# EAGLE board board (EAGLE 7.7.0)
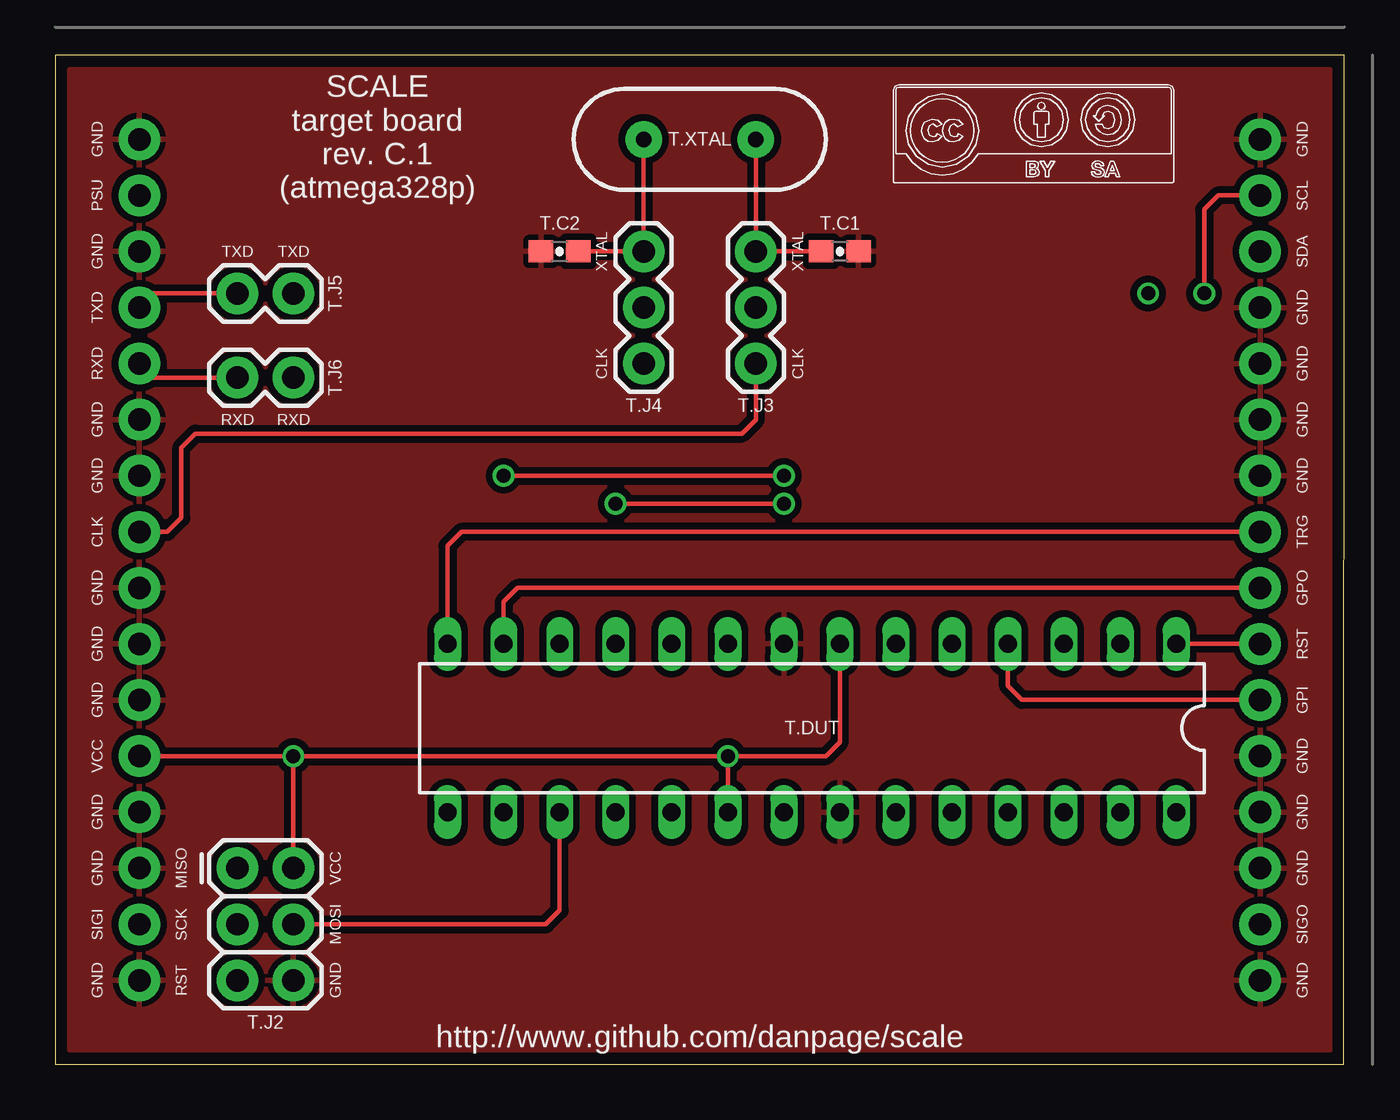
[diagram p0: board, top side]
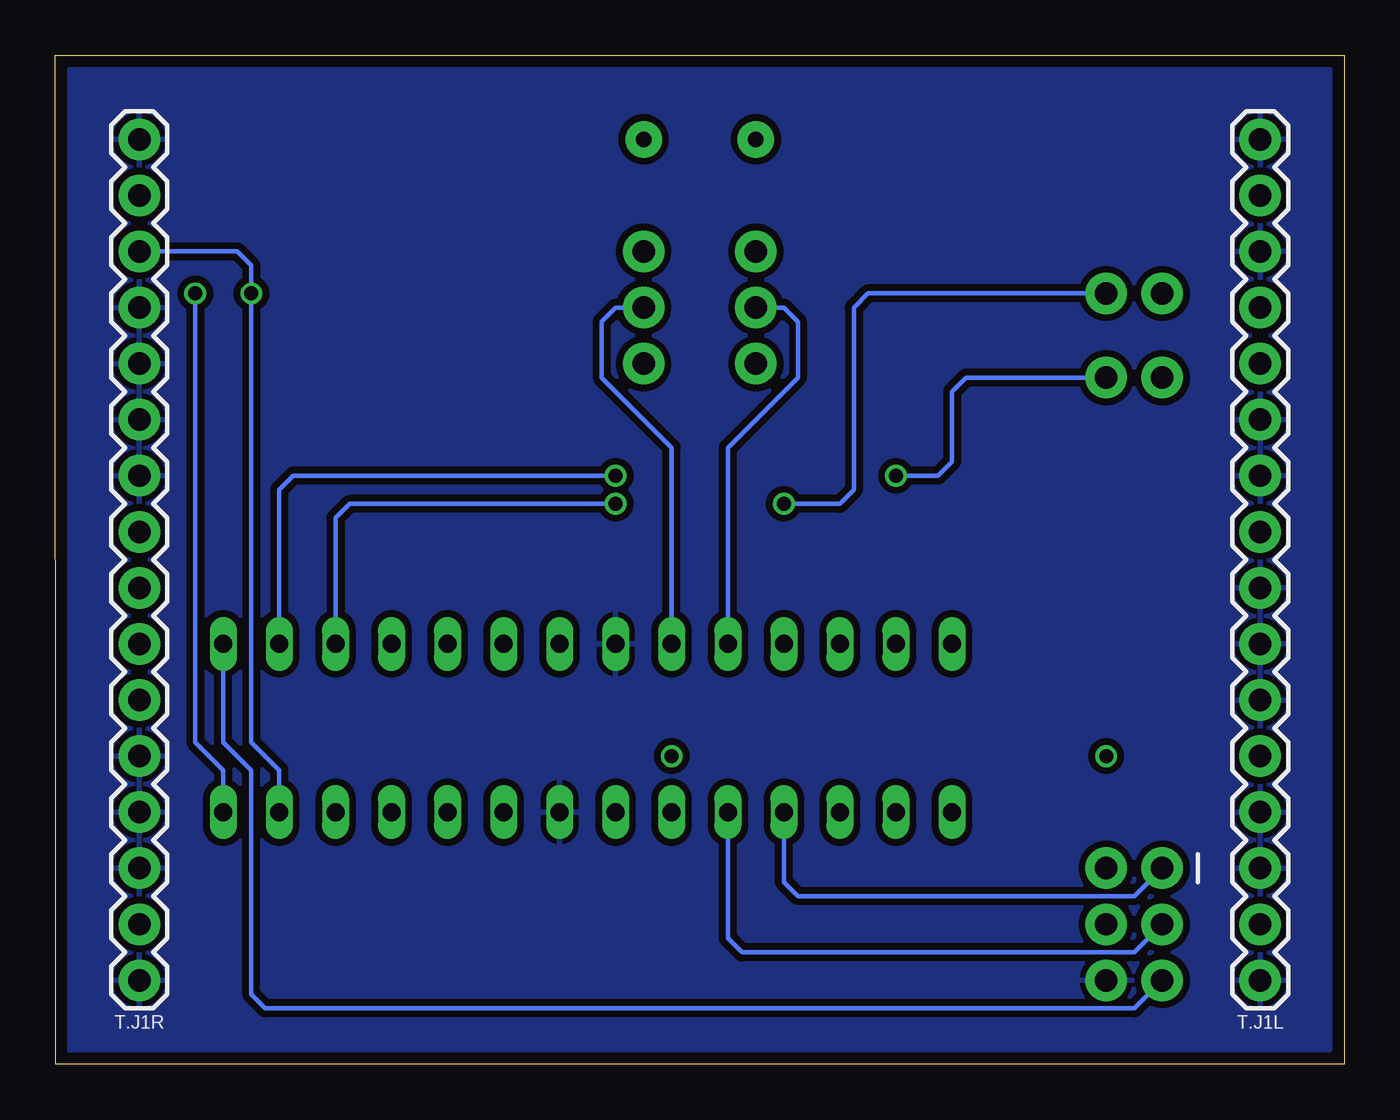
[diagram p1: board, bottom side, seen from below]

Size 58.42 x 45.72 mm. Coordinates in mm from the lower left corner, seen from the top.
Outline: 0,0 58.4,0 58.42,45.72 0,45.72 0,0
Copper layers (1*16): Top 0.0356mm / dielectric 1.5011mm / Bottom 0.0356mm
Design rules "oshpark-2layer": minimum track width 6mil, minimum drill 13mil, track to track 6mil, track to pad 6mil, pad to pad 6mil, via to via 6mil, smd to smd 6mil, copper to edge 15mil, drill to drill 6mil, minimum pad ring 7mil, minimum via ring 7mil, stop-mask expansion 2.5mil, vias tented up to drill 0mil, thermal gap 10mil

## Footprints (pad centres in the part's own frame; a part is rotated, then mirrored left to right if it is on the bottom)
0603-CAP = smd 1.1 x 1: 1 -0.85,0; 2 0.85,0
DIL28-3 = drill 0.813 long: 1 -16.51,-3.81; 2 -13.97,-3.81; 3 -11.43,-3.81; 4 -8.89,-3.81; 5 -6.35,-3.81; 6 -3.81,-3.81; 7 -1.27,-3.81; 8 1.27,-3.81; 9 3.81,-3.81; 10 6.35,-3.81; 11 8.89,-3.81; 12 11.43,-3.81; 13 13.97,-3.81; 14 16.51,-3.81; 15 16.51,3.81; 16 13.97,3.81; 17 11.43,3.81; 18 8.89,3.81; 19 6.35,3.81; 20 3.81,3.81; 21 1.27,3.81; 22 -1.27,3.81; 23 -3.81,3.81; 24 -6.35,3.81; 25 -8.89,3.81; 26 -11.43,3.81; 27 -13.97,3.81; 28 -16.51,3.81
1X16 = drill 1.016 pad 1.88: 1 0,0; 2 2.54,0; 3 5.08,0; 4 7.62,0; 5 10.16,0; 6 12.7,0; 7 15.24,0; 8 17.78,0; 9 20.32,0; 10 22.86,0; 11 25.4,0; 12 27.94,0; 13 30.48,0; 14 33.02,0; 15 35.56,0; 16 38.1,0
2X3 = drill 1.016 pad 1.88: 1 0,0; 2 0,2.54; 3 2.54,0; 4 2.54,2.54; 5 5.08,0; 6 5.08,2.54
1X03 = drill 1.016 pad 1.88: 1 0,0; 2 2.54,0; 3 5.08,0
1X02 = drill 1.016 pad 1.88: 1 0,0; 2 2.54,0
HC49US = drill 0.7 pad 1.651: 1 -2.54,0; 2 2.54,0

## Placement (x,y rotation side)
T.C1  0.022 nF = 22 pF  [0603-CAP]  35.56,36.83 180 top
T.C2  0.022 nF = 22 pF  [0603-CAP]  22.86,36.83 0 top
T.DUT  [DIL28-3]  34.29,15.24 180 top
T.J1L  [1X16]  3.81,3.81 90 bottom
T.J1R  [1X16]  54.61,3.81 90 bottom
T.J2  [2X3]  8.26,8.89 270 top
T.J3  [1X03]  31.75,36.83 270 top
T.J4  [1X03]  26.67,36.83 270 top
T.J5  [1X02]  8.26,34.92 0 top
T.J6  [1X02]  8.26,31.11 0 top
T.XTAL  16 Mhz  [HC49US]  29.21,41.91 0 top

## Library data of the parts
T.C1 T.C2 = SparkFun-Capacitors
T.DUT = ic-package
T.J1L T.J1R T.J3-T.J6 = SparkFun-Connectors
T.J2 = SparkFun-Connectors; PROD_ID: CONN-09701
T.XTAL = SparkFun-FreqCtrl

## Nets
DUT_CLK: T.J1L.9 T.J3.3
DUT_GPI: T.DUT.4 T.J1R.6
DUT_GPO: T.DUT.13 T.J1R.8
DUT_MISO: T.DUT.18 T.J2.1
DUT_MOSI: T.DUT.17 T.J2.4
DUT_RST: T.DUT.1 T.J1R.7 T.J2.5
DUT_RXD: T.J1L.12 T.J6.1
DUT_SCK: T.DUT.19 T.J2.3
DUT_SCL: T.DUT.28 T.J1R.15
DUT_SDA: T.DUT.27 T.J1R.14
DUT_SIGI: T.J1L.2
DUT_SIGO: T.J1R.2
DUT_TRG: T.DUT.14 T.J1R.9
DUT_TXD: T.J1L.13 T.J5.1
DUT_VCC: T.DUT.7 T.DUT.20 T.J1L.5 T.J2.2
DUT_XTAL1: T.DUT.9 T.J3.2
DUT_XTAL2: T.DUT.10 T.J4.2
GND: T.C1.1 T.C2.1 T.DUT.8 T.DUT.22 T.J1L.1 T.J1L.3 T.J1L.4 T.J1L.6 T.J1L.7 T.J1L.8 T.J1L.10 T.J1L.11 T.J1L.14 T.J1L.16 T.J1R.1 T.J1R.3 T.J1R.4 T.J1R.5 T.J1R.10 T.J1R.11 T.J1R.12 T.J1R.13 T.J1R.16 T.J2.6
N$1: T.C1.2 T.J3.1 T.XTAL.2
N$2: T.C2.2 T.J4.1 T.XTAL.1
N$3: T.DUT.3 T.J5.2
N$4: T.DUT.2 T.J6.2
PSU: T.J1L.15

## Tracks (layer width: path | path; a pad name or v marks a point on that pad's centre or on a via)
DUT_CLK
  Top 0.203: T.J1L.9 5.08,24.13 5.71,24.77 5.71,27.94 6.35,28.57 31.11,28.57 31.75,29.21 T.J3.3
DUT_GPI
  Top 0.203: T.J1R.6 43.81,16.51 43.18,17.14 T.DUT.4
DUT_GPO
  Top 0.203: T.J1R.8 20.95,21.59 20.32,20.95 T.DUT.13
DUT_MISO
  Bottom 0.203: T.J2.1 9.53,7.62 24.77,7.62 25.4,8.26 T.DUT.18
DUT_MOSI
  Top 0.203: T.J2.4 22.23,6.35 22.86,6.99 T.DUT.17
DUT_RST
  Top 0.203: T.J1R.7 T.DUT.1
  Bottom 0.203: T.J2.5 9.53,2.54 48.9,2.54 49.53,3.17 49.53,13.34 50.8,14.61 T.DUT.1
DUT_RXD
  Top 0.203: T.J1L.12 4.45,31.11 T.J6.1
DUT_SCK
  Bottom 0.203: T.J2.3 9.53,5.08 27.3,5.08 27.94,5.71 T.DUT.19
DUT_SCL  (via drill 0.64)
  Top 0.203: T.J1R.15 52.7,39.37 52.07,38.73 v52.07,34.92
  Bottom 0.203: v52.07,34.92 52.07,14.61 50.8,13.34 T.DUT.28
DUT_SDA  (via drill 0.64)
  Bottom 0.203: T.J1R.14 50.16,36.83 49.53,36.2 v49.53,34.92 49.53,14.61 48.26,13.34 T.DUT.27 48.26,12.7
DUT_TRG
  Top 0.203: T.J1R.9 18.41,24.13 17.78,23.5 T.DUT.14
DUT_TXD
  Top 0.203: T.J1L.13 4.45,34.92 T.J5.1
DUT_VCC  (via drill 0.64)
  Top 0.203: T.J1L.5 v10.79,13.97 | T.J2.2 v10.79,13.97 | T.DUT.20 v30.48,13.97 | v10.79,13.97 v30.48,13.97 | v30.48,13.97 34.92,13.97 35.56,14.61 T.DUT.7
DUT_XTAL1
  Bottom 0.203: T.J3.2 33.02,34.29 33.66,33.66 33.66,31.11 30.48,27.94 T.DUT.9
DUT_XTAL2
  Bottom 0.203: T.J4.2 25.4,34.29 24.77,33.66 24.77,31.11 27.94,27.94 T.DUT.10
GND
  pour Bottom (isolate 0.305): 0.64,0.64 0.64,45.09 57.78,45.09 57.78,0.64
  pour Top (isolate 0.305): 0.64,0.64 0.64,45.09 57.78,45.09 57.78,0.64
N$1
  Top 0.203: T.XTAL.2 T.J3.1 T.C1.2
N$2
  Top 0.203: T.XTAL.1 T.J4.1 T.C2.2
N$3  (via drill 0.64)
  Top 0.203: v25.4,25.4 v33.02,25.4
  Bottom 0.203: T.J5.2 21.59,34.92 22.23,34.29 22.23,26.04 22.86,25.4 v25.4,25.4 | v33.02,25.4 45.09,25.4 45.72,24.77 T.DUT.3
N$4  (via drill 0.64)
  Top 0.203: v20.32,26.67 v33.02,26.67
  Bottom 0.203: T.J6.2 17.14,31.11 17.78,30.48 17.78,27.3 18.41,26.67 v20.32,26.67 | v33.02,26.67 47.62,26.67 48.26,26.04 T.DUT.2

## Text on the board
tPlace: GND | GND | SCALE / target board / rev. C.1 / (atmega328p) | PSU | SCL | GND | TXD | TXD | XTAL | XTAL | SDA | TXD | GND | RXD | CLK | CLK | GND | GND | RXD | RXD | GND | GND | GND | CLK | TRG | GND | GPO | GND | RST | GND | GPI | VCC | GND | GND | GND | GND | MISO | VCC | GND | SIGI | SCK | MOSI | SIGO | GND | RST | GND | GND | http://www.github.com/danpage/scale